# EAGLE board IR Ranger PD Module (EAGLE 5.11)
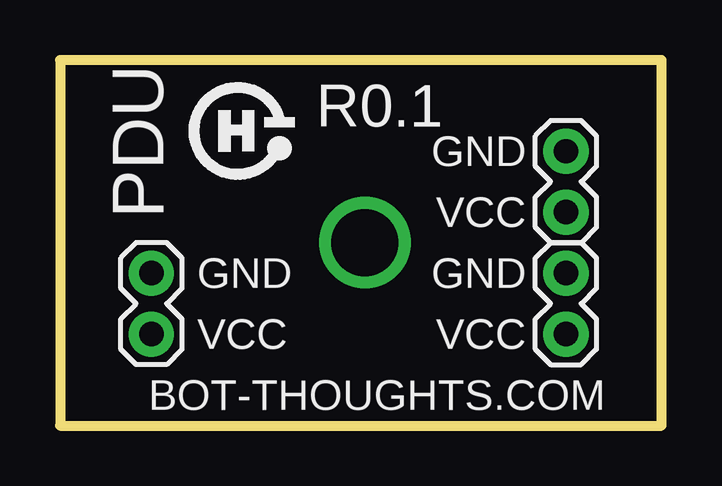
[diagram p0: board, top side]
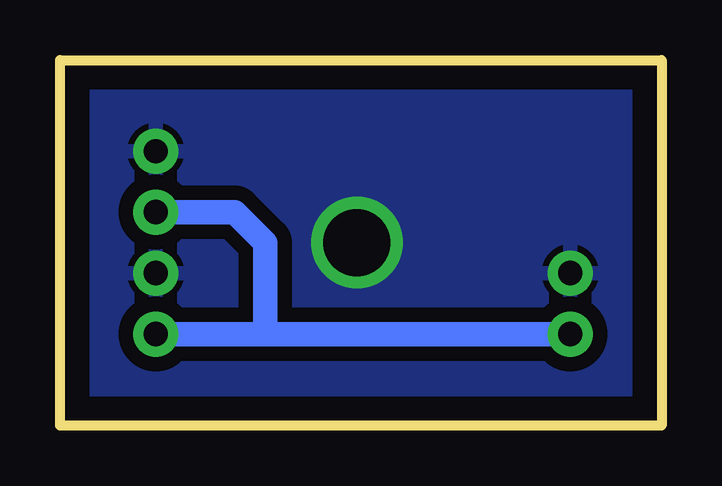
[diagram p1: board, bottom side, seen from below]

Size 25.07 x 15.23 mm. Coordinates in mm from the lower left corner, seen from the top.
Outline: 0,0 25.07,0 25.07,15.23 0,15.23 0,0
Copper layers (1*16): Top 0.035mm / dielectric 1.5mm / Bottom 0.035mm
Design rules "default": minimum track width 10mil, minimum drill 24mil, track to track 8mil, track to pad 8mil, pad to pad 8mil, via to via 8mil, smd to smd 8mil, copper to edge 40mil, drill to drill 8mil, minimum pad ring 10mil, minimum via ring 8mil, stop-mask expansion 4mil, vias tented up to drill 0mil, thermal gap 10mil

## Footprints (pad centres in the part's own frame; a part is rotated, then mirrored left to right if it is on the bottom)
1X02 = drill 1.016 pad 1.88 round: 1 0,0; 2 2.54,0

## Placement (x,y rotation side)
JP1  IN  [1X02]  3.81,6.35 270 top
JP2  LEFT  [1X02]  21.08,11.43 270 top
JP3  RIGHT  [1X02]  21.08,3.81 90 top
U$1  OSHW-LOGO  [OSHW-LOGO]  7.37,12.32 0 top

## Library data of the parts
JP1-JP3 U$1 = SparkFun

## Nets
GND: JP1.1 JP2.1 JP3.2
VCC: JP1.2 JP2.2 JP3.1

## Tracks (layer width: path | path; a pad name or v marks a point on that pad's centre or on a via)
GND  (via drill 2.8)
  other vias: 12.7,7.62
  pour Bottom (isolate 0.61): 0,15.24 24.13,15.24 24.13,0 0,0
VCC
  Bottom 1.016: JP1.2 10.16,3.81 16.51,3.81 | 16.51,3.81 JP3.1 | JP2.2 17.78,8.89 16.51,7.62 16.51,3.81

## Text on the board
tNames: R0.1 | GND | VCC | PDU | GND | GND | VCC | VCC | BOT-THOUGHTS.COM